# EAGLE board tinyI2C_P (EAGLE 6.5.0), part 1 of 2
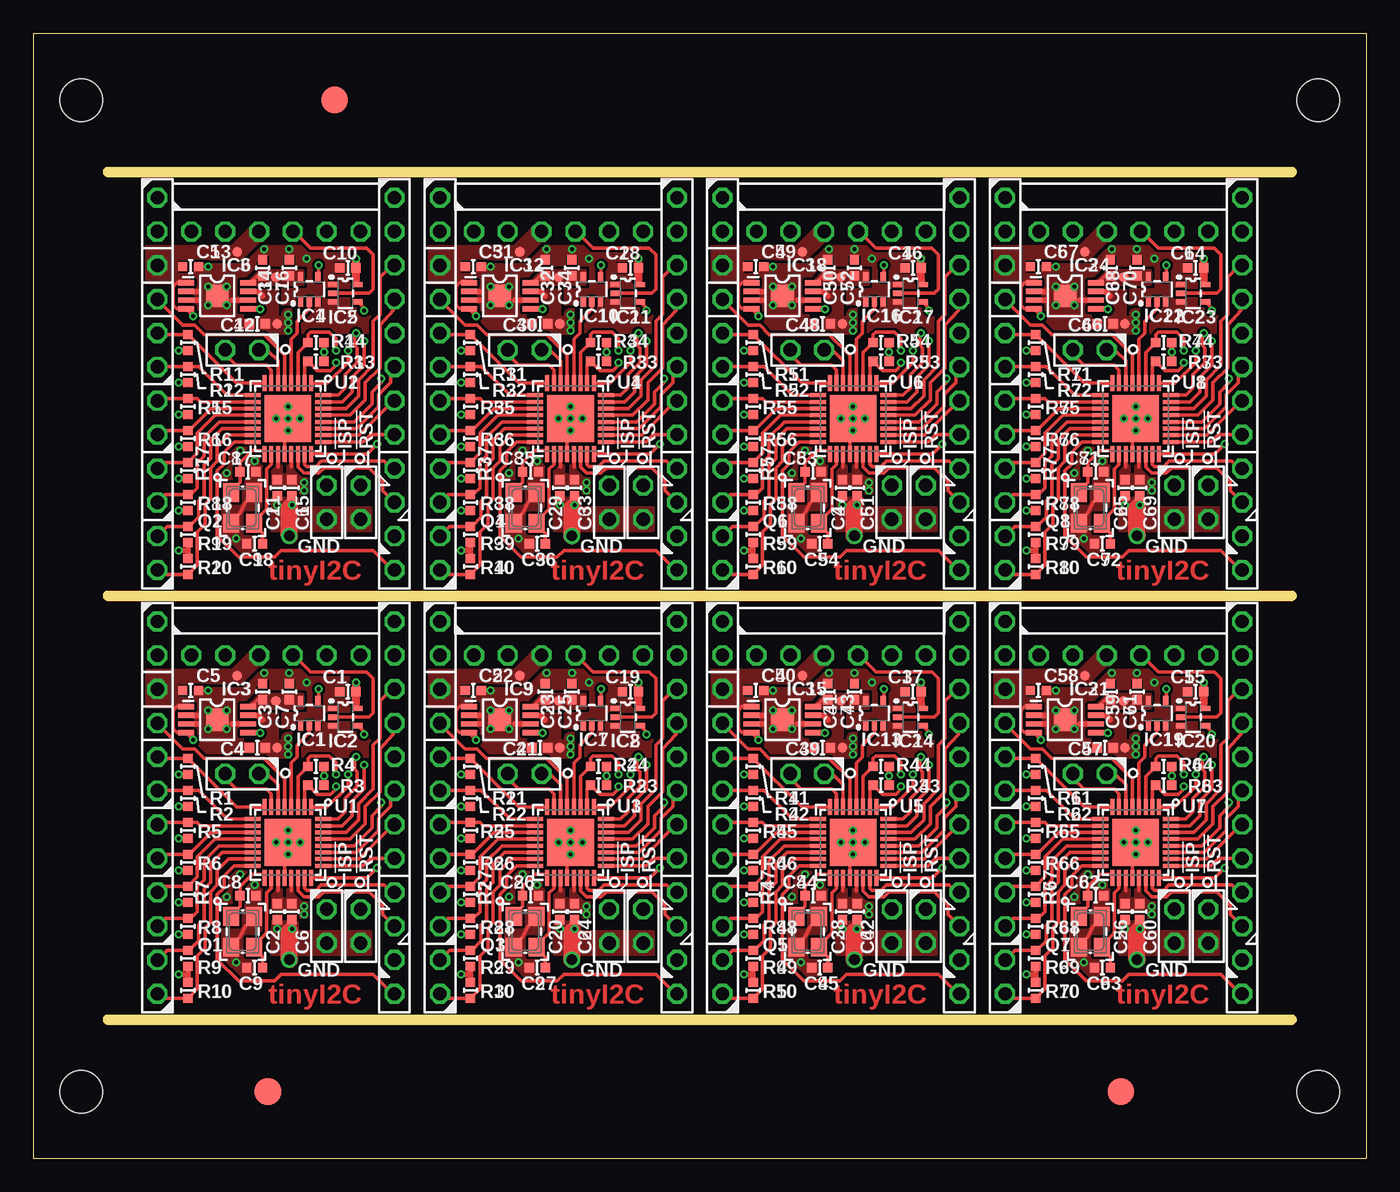
[diagram p0: board, top side]
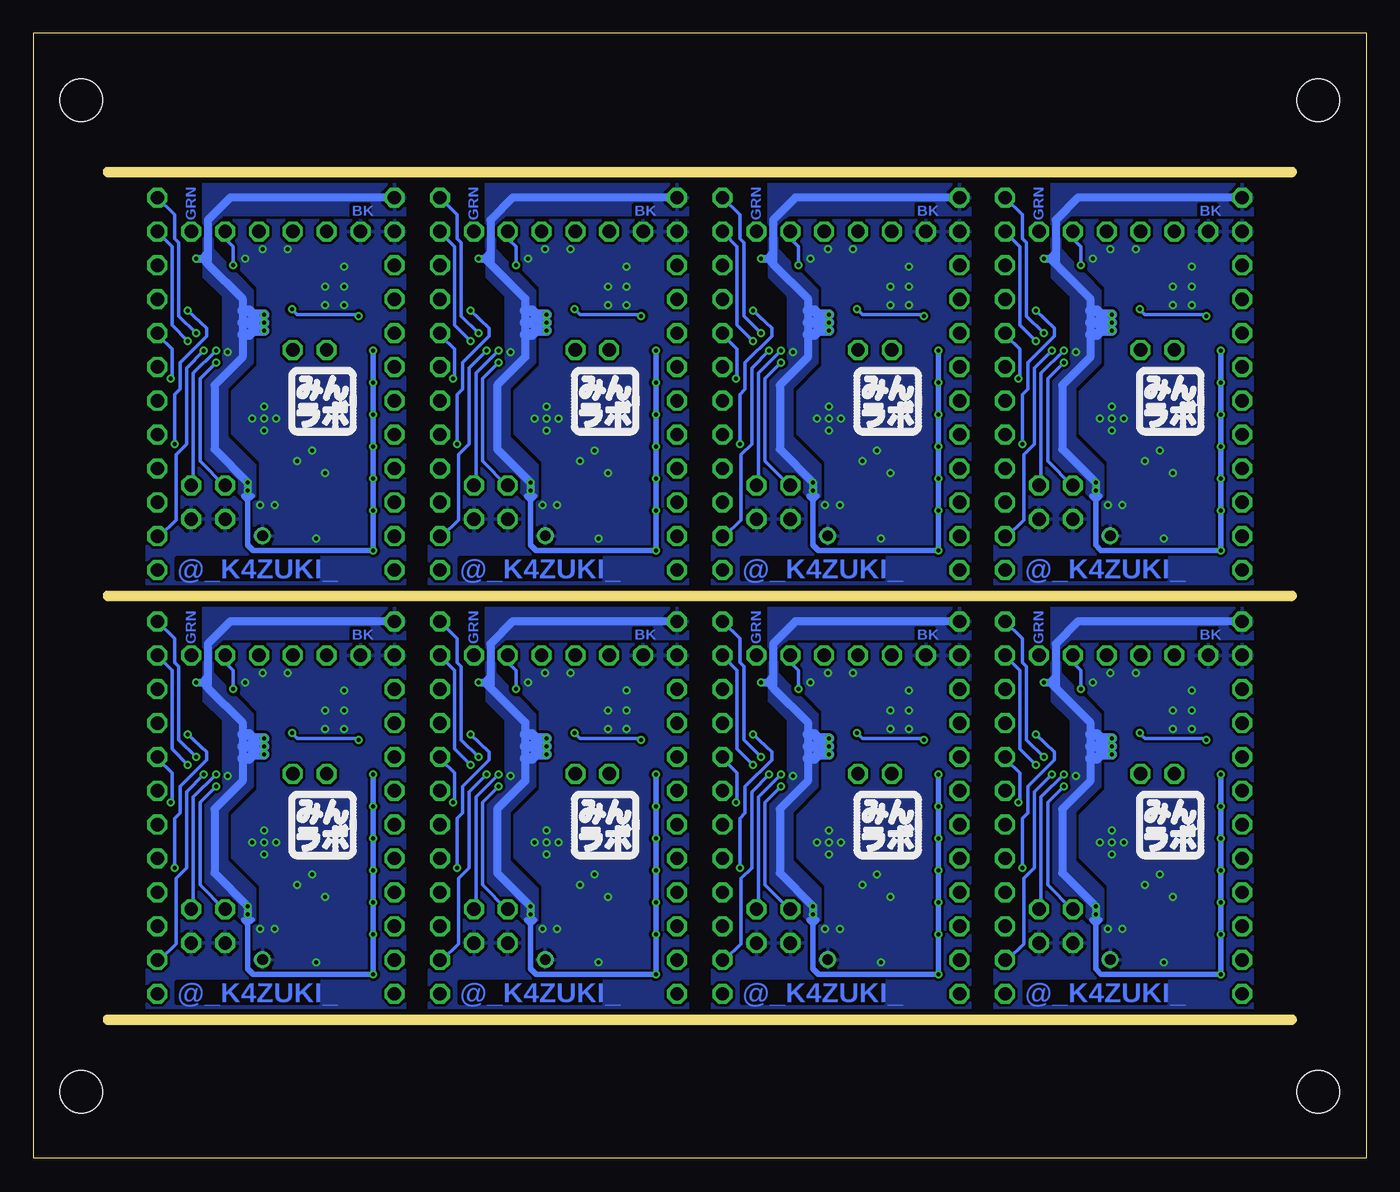
[diagram p1: board, bottom side, seen from below]

Size 100 x 84.4 mm. Coordinates in mm from the lower left corner, seen from the top.
Outline: 0,84.4 100,84.4 100,0 0,0 0,84.4
Copper layers (1*16): Top 0.035mm / dielectric 1.5mm / Bottom 0.035mm
Design rules "default *": minimum track width 0.16mm, minimum drill 0.3mm, track to track 0.16mm, track to pad 0.16mm, pad to pad 0.16mm, via to via 0.16mm, smd to smd 0mil, copper to edge 0.4mm, drill to drill 0.16mm, minimum pad ring 0.15mm, minimum via ring 0.15mm, stop-mask expansion 4mil, vias tented up to drill 100mil, thermal gap 10mil
Net classes: 0 default: clearance 0.2 mm; 1 power: clearance 0.2 mm
Holes 3.2 mm at 3.6,79.4 96.4,5 96.4,79.4 3.6,5
tRestrict: 296 lines
bRestrict: 48 lines
Milling: area 5.5,73.8 to 94.5,74.2; area 5.5,42 to 94.5,42.4; area 5.5,10.2 to 94.5,10.6

## Footprints (pad centres in the part's own frame; a part is rotated, then mirrored left to right if it is on the bottom)
C0402 = smd 0.7 x 0.7: 1 -0.6,0; 2 0.6,0
SC70-5 = smd 0.4 x 0.7: 1 -0.65,-0.95; 2 0,-0.95; 3 0.65,-0.95; 4 0.65,0.95; 5 -0.65,0.95
IC_08_0.65_160MIL_EP = smd 0.4 x 1.2: 1 -0.976,-2.313; 2 -0.326,-2.313; 3 0.324,-2.313; 4 0.974,-2.313; 5 0.974,2.312; 6 0.324,2.312; 7 -0.326,2.312; 8 -0.976,2.312 | smd 1.7 x 1.7: EXP 0,0
NX3225 = smd 1.4 x 1.2: 1 -1.15,-0.85; 2 1.15,-0.85; 3 1.15,0.85; 4 -1.15,0.85
TP07R = smd 0.7 x 0.7: TP 0,0
B1,27 = smd 1.27 x 1.27: TP 0,0
TP20R = smd 2 x 2: TP 0,0
HVQFN33 = smd 1.2 x 0.3: 1 -2.65,1.75; 2 -2.65,1.25; 3 -2.65,0.75; 4 -2.65,0.25; 5 -2.65,-0.25; 6 -2.65,-0.75; 7 -2.65,-1.25; 8 -2.65,-1.75; 17 2.65,-1.75; 18 2.65,-1.25; 19 2.65,-0.75; 20 2.65,-0.25; 21 2.65,0.25; 22 2.65,0.75; 23 2.65,1.25; 24 2.65,1.75 | smd 0.3 x 1.2: 9 -1.75,-2.65; 10 -1.25,-2.65; 11 -0.75,-2.65; 12 -0.25,-2.65; 13 0.25,-2.65; 14 0.75,-2.65; 15 1.25,-2.65; 16 1.75,-2.65; 25 1.75,2.65; 26 1.25,2.65; 27 0.75,2.65; 28 0.25,2.65; 29 -0.25,2.65; 30 -0.75,2.65; 31 -1.25,2.65; 32 -1.75,2.65 | smd 3.5 x 3.5: EXP 0,0
TSW-112-02-S-S = drill 1 pad 1.5 octagon: 1 13.97,0; 2 11.43,0; 3 8.89,0; 4 6.35,0; 5 3.81,0; 6 1.27,0; 7 -1.27,0; 8 -3.81,0; 9 -6.35,0; 10 -8.89,0; 11 -11.43,0; 12 -13.97,0
TSW-106-02-S-S-RA = drill 1 pad 1.5 octagon: 1 6.35,1.524; 2 3.81,1.524; 3 1.27,1.524; 4 -1.27,1.524; 5 -3.81,1.524; 6 -6.35,1.524
TSW-102-02-S-S = drill 1 pad 1.5 octagon: 1 1.27,0; 2 -1.27,0

## Placement (x,y rotation side)
C1  0.1u/1005  [C0402]  23.6,35 180 top
C2  0.1u/1005  [C0402]  18.3,18.5 270 top
C3  10u/1005  [C0402]  17.2,35 90 top
C4  10u/1005  [C0402]  16.8,30.8 180 top
C5  10u/1005  [C0402]  11.8,35.1 0 top
C6  0.1u/1005  [C0402]  19.4,18.5 270 top
C7  0.1u/1005  [C0402]  19.2,35 90 top
C8  18p/1005  [C0402]  16.1,19.7 0 top
C9  18p/1005  [C0402]  16.6,14.3 180 top
C10  0.1u/1005  [C0402]  23.6,66.8 180 top
C11  0.1u/1005  [C0402]  18.3,50.3 270 top
C12  10u/1005  [C0402]  16.8,62.6 180 top
C13  10u/1005  [C0402]  11.8,66.9 0 top
C14  10u/1005  [C0402]  17.2,66.8 90 top
C15  0.1u/1005  [C0402]  19.4,50.3 270 top
C16  0.1u/1005  [C0402]  19.2,66.8 90 top
C17  18p/1005  [C0402]  16.1,51.5 0 top
C18  18p/1005  [C0402]  16.6,46.1 180 top
C19  0.1u/1005  [C0402]  44.8,35 180 top
C20  0.1u/1005  [C0402]  39.5,18.5 270 top
C21  10u/1005  [C0402]  38,30.8 180 top
C22  10u/1005  [C0402]  33,35.1 0 top
C23  10u/1005  [C0402]  38.4,35 90 top
C24  0.1u/1005  [C0402]  40.6,18.5 270 top
C25  0.1u/1005  [C0402]  40.4,35 90 top
C26  18p/1005  [C0402]  37.3,19.7 0 top
C27  18p/1005  [C0402]  37.8,14.3 180 top
C28  0.1u/1005  [C0402]  44.8,66.8 180 top
C29  0.1u/1005  [C0402]  39.5,50.3 270 top
C30  10u/1005  [C0402]  38,62.6 180 top
C31  10u/1005  [C0402]  33,66.9 0 top
C32  10u/1005  [C0402]  38.4,66.8 90 top
C33  0.1u/1005  [C0402]  40.6,50.3 270 top
C34  0.1u/1005  [C0402]  40.4,66.8 90 top
C35  18p/1005  [C0402]  37.3,51.5 0 top
C36  18p/1005  [C0402]  37.8,46.1 180 top
C37  0.1u/1005  [C0402]  66,35 180 top
C38  0.1u/1005  [C0402]  60.7,18.5 270 top
C39  10u/1005  [C0402]  59.2,30.8 180 top
C40  10u/1005  [C0402]  54.2,35.1 0 top
C41  10u/1005  [C0402]  59.6,35 90 top
C42  0.1u/1005  [C0402]  61.8,18.5 270 top
C43  0.1u/1005  [C0402]  61.6,35 90 top
C44  18p/1005  [C0402]  58.5,19.7 0 top
C45  18p/1005  [C0402]  59,14.3 180 top
C46  0.1u/1005  [C0402]  66,66.8 180 top
C47  0.1u/1005  [C0402]  60.7,50.3 270 top
C48  10u/1005  [C0402]  59.2,62.6 180 top
C49  10u/1005  [C0402]  54.2,66.9 0 top
C50  10u/1005  [C0402]  59.6,66.8 90 top
C51  0.1u/1005  [C0402]  61.8,50.3 270 top
C52  0.1u/1005  [C0402]  61.6,66.8 90 top
C53  18p/1005  [C0402]  58.5,51.5 0 top
C54  18p/1005  [C0402]  59,46.1 180 top
C55  0.1u/1005  [C0402]  87.2,35 180 top
C56  0.1u/1005  [C0402]  81.9,18.5 270 top
C57  10u/1005  [C0402]  80.4,30.8 180 top
C58  10u/1005  [C0402]  75.4,35.1 0 top
C59  10u/1005  [C0402]  80.8,35 90 top
C60  0.1u/1005  [C0402]  83,18.5 270 top
C61  0.1u/1005  [C0402]  82.8,35 90 top
C62  18p/1005  [C0402]  79.7,19.7 0 top
C63  18p/1005  [C0402]  80.2,14.3 180 top
C64  0.1u/1005  [C0402]  87.2,66.8 180 top
C65  0.1u/1005  [C0402]  81.9,50.3 270 top
C66  10u/1005  [C0402]  80.4,62.6 180 top
C67  10u/1005  [C0402]  75.4,66.9 0 top
C68  10u/1005  [C0402]  80.8,66.8 90 top
C69  0.1u/1005  [C0402]  83,50.3 270 top
C70  0.1u/1005  [C0402]  82.8,66.8 90 top
C71  18p/1005  [C0402]  79.7,51.5 0 top
C72  18p/1005  [C0402]  80.2,46.1 180 top
I1  ICON_MINLAB_5.2S  [ICON_MINLAB_5.2MM]  17.2,22.5 0 bottom
I2  ICON_MINLAB_5.2S  [ICON_MINLAB_5.2MM]  17.2,54.3 0 bottom
I3  ICON_MINLAB_5.2S  [ICON_MINLAB_5.2MM]  38.4,22.5 0 bottom
I4  ICON_MINLAB_5.2S  [ICON_MINLAB_5.2MM]  38.4,54.3 0 bottom
I5  ICON_MINLAB_5.2S  [ICON_MINLAB_5.2MM]  59.6,22.5 0 bottom
I6  ICON_MINLAB_5.2S  [ICON_MINLAB_5.2MM]  59.6,54.3 0 bottom
I7  ICON_MINLAB_5.2S  [ICON_MINLAB_5.2MM]  80.8,22.5 0 bottom
I8  ICON_MINLAB_5.2S  [ICON_MINLAB_5.2MM]  80.8,54.3 0 bottom
IC1  74LVC1G125DCK  [SC70-5]  20.7,33.4 0 top
IC2  74LVC1G125DCK  [SC70-5]  23.4,33.1 270 top
IC3  IC_LDO_MIC5355  [IC_08_0.65_160MIL_EP]  13.8,32.9 270 top
IC4  74LVC1G125DCK  [SC70-5]  20.7,65.2 0 top
IC5  74LVC1G125DCK  [SC70-5]  23.4,64.9 270 top
IC6  IC_LDO_MIC5355  [IC_08_0.65_160MIL_EP]  13.8,64.7 270 top
IC7  74LVC1G125DCK  [SC70-5]  41.9,33.4 0 top
IC8  74LVC1G125DCK  [SC70-5]  44.6,33.1 270 top
IC9  IC_LDO_MIC5355  [IC_08_0.65_160MIL_EP]  35,32.9 270 top
IC10  74LVC1G125DCK  [SC70-5]  41.9,65.2 0 top
IC11  74LVC1G125DCK  [SC70-5]  44.6,64.9 270 top
IC12  IC_LDO_MIC5355  [IC_08_0.65_160MIL_EP]  35,64.7 270 top
IC13  74LVC1G125DCK  [SC70-5]  63.1,33.4 0 top
IC14  74LVC1G125DCK  [SC70-5]  65.8,33.1 270 top
IC15  IC_LDO_MIC5355  [IC_08_0.65_160MIL_EP]  56.2,32.9 270 top
IC16  74LVC1G125DCK  [SC70-5]  63.1,65.2 0 top
IC17  74LVC1G125DCK  [SC70-5]  65.8,64.9 270 top
IC18  IC_LDO_MIC5355  [IC_08_0.65_160MIL_EP]  56.2,64.7 270 top
IC19  74LVC1G125DCK  [SC70-5]  84.3,33.4 0 top
IC20  74LVC1G125DCK  [SC70-5]  87,33.1 270 top
IC21  IC_LDO_MIC5355  [IC_08_0.65_160MIL_EP]  77.4,32.9 270 top
IC22  74LVC1G125DCK  [SC70-5]  84.3,65.2 0 top
IC23  74LVC1G125DCK  [SC70-5]  87,64.9 270 top
IC24  IC_LDO_MIC5355  [IC_08_0.65_160MIL_EP]  77.4,64.7 270 top
Q1  12MHz  [NX3225]  15.7,17 270 top
Q2  12MHz  [NX3225]  15.7,48.8 270 top
Q3  12MHz  [NX3225]  36.9,17 270 top
Q4  12MHz  [NX3225]  36.9,48.8 270 top
Q5  12MHz  [NX3225]  58.1,17 270 top
Q6  12MHz  [NX3225]  58.1,48.8 270 top
Q7  12MHz  [NX3225]  79.3,17 270 top
Q8  12MHz  [NX3225]  79.3,48.8 270 top
R1  220/1005  [C0402]  11.6,29.4 270 top
R2  220/1005  [C0402]  11.6,27 270 top
R3  10k/1005  [C0402]  21.2,28 0 top
R4  10k/1005  [C0402]  21.2,29.4 0 top
R5  10k/1005  [C0402]  11.6,24.6 270 top
R6  10k/1005  [C0402]  11.6,22.2 270 top
R7  10k/1005  [C0402]  11.6,19.8 270 top
R8  10k/1005  [C0402]  11.6,17.4 270 top
R9  10k/1005  [C0402]  11.6,15 270 top
R10  10k/1005  [C0402]  11.6,12.6 90 top
R11  220/1005  [C0402]  11.6,61.2 270 top
R12  220/1005  [C0402]  11.6,58.8 270 top
R13  10k/1005  [C0402]  21.2,59.8 0 top
R14  10k/1005  [C0402]  21.2,61.2 0 top
R15  10k/1005  [C0402]  11.6,56.4 270 top
R16  10k/1005  [C0402]  11.6,54 270 top
R17  10k/1005  [C0402]  11.6,51.6 270 top
R18  10k/1005  [C0402]  11.6,49.2 270 top
R19  10k/1005  [C0402]  11.6,46.8 270 top
R20  10k/1005  [C0402]  11.6,44.4 90 top
R21  220/1005  [C0402]  32.8,29.4 270 top
R22  220/1005  [C0402]  32.8,27 270 top
R23  10k/1005  [C0402]  42.4,28 0 top
R24  10k/1005  [C0402]  42.4,29.4 0 top
R25  10k/1005  [C0402]  32.8,24.6 270 top
R26  10k/1005  [C0402]  32.8,22.2 270 top
R27  10k/1005  [C0402]  32.8,19.8 270 top
R28  10k/1005  [C0402]  32.8,17.4 270 top
R29  10k/1005  [C0402]  32.8,15 270 top
R30  10k/1005  [C0402]  32.8,12.6 90 top
R31  220/1005  [C0402]  32.8,61.2 270 top
R32  220/1005  [C0402]  32.8,58.8 270 top
R33  10k/1005  [C0402]  42.4,59.8 0 top
R34  10k/1005  [C0402]  42.4,61.2 0 top
R35  10k/1005  [C0402]  32.8,56.4 270 top
R36  10k/1005  [C0402]  32.8,54 270 top
R37  10k/1005  [C0402]  32.8,51.6 270 top
R38  10k/1005  [C0402]  32.8,49.2 270 top
R39  10k/1005  [C0402]  32.8,46.8 270 top
R40  10k/1005  [C0402]  32.8,44.4 90 top
R41  220/1005  [C0402]  54,29.4 270 top
R42  220/1005  [C0402]  54,27 270 top
R43  10k/1005  [C0402]  63.6,28 0 top
R44  10k/1005  [C0402]  63.6,29.4 0 top
R45  10k/1005  [C0402]  54,24.6 270 top
R46  10k/1005  [C0402]  54,22.2 270 top
R47  10k/1005  [C0402]  54,19.8 270 top
R48  10k/1005  [C0402]  54,17.4 270 top
R49  10k/1005  [C0402]  54,15 270 top
R50  10k/1005  [C0402]  54,12.6 90 top
R51  220/1005  [C0402]  54,61.2 270 top
R52  220/1005  [C0402]  54,58.8 270 top
R53  10k/1005  [C0402]  63.6,59.8 0 top
R54  10k/1005  [C0402]  63.6,61.2 0 top
R55  10k/1005  [C0402]  54,56.4 270 top
R56  10k/1005  [C0402]  54,54 270 top
R57  10k/1005  [C0402]  54,51.6 270 top
R58  10k/1005  [C0402]  54,49.2 270 top
R59  10k/1005  [C0402]  54,46.8 270 top
R60  10k/1005  [C0402]  54,44.4 90 top
R61  220/1005  [C0402]  75.2,29.4 270 top
R62  220/1005  [C0402]  75.2,27 270 top
R63  10k/1005  [C0402]  84.8,28 0 top
R64  10k/1005  [C0402]  84.8,29.4 0 top
R65  10k/1005  [C0402]  75.2,24.6 270 top
R66  10k/1005  [C0402]  75.2,22.2 270 top
R67  10k/1005  [C0402]  75.2,19.8 270 top
R68  10k/1005  [C0402]  75.2,17.4 270 top
R69  10k/1005  [C0402]  75.2,15 270 top
R70  10k/1005  [C0402]  75.2,12.6 90 top
R71  220/1005  [C0402]  75.2,61.2 270 top
R72  220/1005  [C0402]  75.2,58.8 270 top
R73  10k/1005  [C0402]  84.8,59.8 0 top
R74  10k/1005  [C0402]  84.8,61.2 0 top
R75  10k/1005  [C0402]  75.2,56.4 270 top
R76  10k/1005  [C0402]  75.2,54 270 top
R77  10k/1005  [C0402]  75.2,51.6 270 top
R78  10k/1005  [C0402]  75.2,49.2 270 top
R79  10k/1005  [C0402]  75.2,46.8 270 top
R80  10k/1005  [C0402]  75.2,44.4 90 top
TP1  TPTP07R  [TP07R]  15.3,36.2 0 top
TP2  TPTP07R  [TP07R]  18.3,30.8 0 top
TP3  TPB1,27  [B1,27]  19.2,14.9 0 top
TP4  TPTP20R  [TP20R]  22.6,79.4 0 top
TP5  TPTP20R  [TP20R]  81.6,5 0 top
TP6  TPTP07R  [TP07R]  18.2,34.3 0 top
TP7  TPB1,27  [B1,27]  19.2,14.9 0 bottom
TP8  TPTP20R  [TP20R]  17.6,5 0 top
TP9  TPTP07R  [TP07R]  15.3,68 0 top
TP10  TPTP07R  [TP07R]  18.3,62.6 0 top
TP11  TPB1,27  [B1,27]  19.2,46.7 0 top
TP12  TPTP07R  [TP07R]  18.2,66.1 0 top
TP13  TPB1,27  [B1,27]  19.2,46.7 0 bottom
TP14  TPTP07R  [TP07R]  36.5,36.2 0 top
TP15  TPTP07R  [TP07R]  39.5,30.8 0 top
TP16  TPB1,27  [B1,27]  40.4,14.9 0 top
TP17  TPTP07R  [TP07R]  39.4,34.3 0 top
TP18  TPB1,27  [B1,27]  40.4,14.9 0 bottom
TP19  TPTP07R  [TP07R]  36.5,68 0 top
TP20  TPTP07R  [TP07R]  39.5,62.6 0 top
TP21  TPB1,27  [B1,27]  40.4,46.7 0 top
TP22  TPTP07R  [TP07R]  39.4,66.1 0 top
TP23  TPB1,27  [B1,27]  40.4,46.7 0 bottom
TP24  TPTP07R  [TP07R]  57.7,36.2 0 top
TP25  TPTP07R  [TP07R]  60.7,30.8 0 top
TP26  TPB1,27  [B1,27]  61.6,14.9 0 top
TP27  TPTP07R  [TP07R]  60.6,34.3 0 top
TP28  TPB1,27  [B1,27]  61.6,14.9 0 bottom
TP29  TPTP07R  [TP07R]  57.7,68 0 top
TP30  TPTP07R  [TP07R]  60.7,62.6 0 top
TP31  TPB1,27  [B1,27]  61.6,46.7 0 top
TP32  TPTP07R  [TP07R]  60.6,66.1 0 top
TP33  TPB1,27  [B1,27]  61.6,46.7 0 bottom
TP34  TPTP07R  [TP07R]  78.9,36.2 0 top
TP35  TPTP07R  [TP07R]  81.9,30.8 0 top
TP36  TPB1,27  [B1,27]  82.8,14.9 0 top
TP37  TPTP07R  [TP07R]  81.8,34.3 0 top
TP38  TPB1,27  [B1,27]  82.8,14.9 0 bottom
TP39  TPTP07R  [TP07R]  78.9,68 0 top
TP40  TPTP07R  [TP07R]  81.9,62.6 0 top
TP41  TPB1,27  [B1,27]  82.8,46.7 0 top
TP42  TPTP07R  [TP07R]  81.8,66.1 0 top
TP43  TPB1,27  [B1,27]  82.8,46.7 0 bottom
U1  LPC824M201JHI33  [HVQFN33]  19.1,23.7 270 top
U2  LPC824M201JHI33  [HVQFN33]  19.1,55.5 270 top
U3  LPC824M201JHI33  [HVQFN33]  40.3,23.7 270 top
U4  LPC824M201JHI33  [HVQFN33]  40.3,55.5 270 top
U5  LPC824M201JHI33  [HVQFN33]  61.5,23.7 270 top
U6  LPC824M201JHI33  [HVQFN33]  61.5,55.5 270 top
U7  LPC824M201JHI33  [HVQFN33]  82.7,23.7 270 top
U8  LPC824M201JHI33  [HVQFN33]  82.7,55.5 270 top
X1  TSW-112-02-S-S  [TSW-112-02-S-S]  9.31,26.3 90 top
X2  TSW-112-02-S-S  [TSW-112-02-S-S]  27.09,26.3 90 top
X3  TSW-106-02-S-S-RA  [TSW-106-02-S-S-RA]  18.2,39.25 180 top
X4  TSW-102-02-S-S  [TSW-102-02-S-S]  24.55,17.41 90 top
X5  TSW-102-02-S-S  [TSW-102-02-S-S]  15.66,28.84 0 top
X6  TSW-102-02-S-S  [TSW-102-02-S-S]  22.01,17.41 90 top
X7  TSW-106-02-S-S-RA  [TSW-106-02-S-S-RA]  18.2,71.05 180 top
X8  TSW-112-02-S-S  [TSW-112-02-S-S]  9.31,58.1 90 top
X9  TSW-112-02-S-S  [TSW-112-02-S-S]  27.09,58.1 90 top
X10  TSW-102-02-S-S  [TSW-102-02-S-S]  24.55,49.21 90 top
X11  TSW-102-02-S-S  [TSW-102-02-S-S]  15.66,60.64 0 top
X12  TSW-102-02-S-S  [TSW-102-02-S-S]  22.01,49.21 90 top
X13  TSW-106-02-S-S-RA  [TSW-106-02-S-S-RA]  39.4,39.25 180 top
X14  TSW-112-02-S-S  [TSW-112-02-S-S]  30.51,26.3 90 top
X15  TSW-112-02-S-S  [TSW-112-02-S-S]  48.29,26.3 90 top
X16  TSW-102-02-S-S  [TSW-102-02-S-S]  45.75,17.41 90 top
X17  TSW-102-02-S-S  [TSW-102-02-S-S]  36.86,28.84 0 top
X18  TSW-102-02-S-S  [TSW-102-02-S-S]  43.21,17.41 90 top
X19  TSW-106-02-S-S-RA  [TSW-106-02-S-S-RA]  39.4,71.05 180 top
X20  TSW-112-02-S-S  [TSW-112-02-S-S]  30.51,58.1 90 top
X21  TSW-112-02-S-S  [TSW-112-02-S-S]  48.29,58.1 90 top
X22  TSW-102-02-S-S  [TSW-102-02-S-S]  45.75,49.21 90 top
X23  TSW-102-02-S-S  [TSW-102-02-S-S]  36.86,60.64 0 top
X24  TSW-102-02-S-S  [TSW-102-02-S-S]  43.21,49.21 90 top
X25  TSW-106-02-S-S-RA  [TSW-106-02-S-S-RA]  60.6,39.25 180 top
X26  TSW-112-02-S-S  [TSW-112-02-S-S]  51.71,26.3 90 top
X27  TSW-112-02-S-S  [TSW-112-02-S-S]  69.49,26.3 90 top
X28  TSW-102-02-S-S  [TSW-102-02-S-S]  66.95,17.41 90 top
X29  TSW-102-02-S-S  [TSW-102-02-S-S]  58.06,28.84 0 top
X30  TSW-102-02-S-S  [TSW-102-02-S-S]  64.41,17.41 90 top
X31  TSW-106-02-S-S-RA  [TSW-106-02-S-S-RA]  60.6,71.05 180 top
X32  TSW-112-02-S-S  [TSW-112-02-S-S]  51.71,58.1 90 top
X33  TSW-112-02-S-S  [TSW-112-02-S-S]  69.49,58.1 90 top
X34  TSW-102-02-S-S  [TSW-102-02-S-S]  66.95,49.21 90 top
X35  TSW-102-02-S-S  [TSW-102-02-S-S]  58.06,60.64 0 top
X36  TSW-102-02-S-S  [TSW-102-02-S-S]  64.41,49.21 90 top
X37  TSW-106-02-S-S-RA  [TSW-106-02-S-S-RA]  81.8,39.25 180 top
X38  TSW-112-02-S-S  [TSW-112-02-S-S]  72.91,26.3 90 top
X39  TSW-112-02-S-S  [TSW-112-02-S-S]  90.69,26.3 90 top
X40  TSW-102-02-S-S  [TSW-102-02-S-S]  88.15,17.41 90 top
X41  TSW-102-02-S-S  [TSW-102-02-S-S]  79.26,28.84 0 top
X42  TSW-102-02-S-S  [TSW-102-02-S-S]  85.61,17.41 90 top
X43  TSW-106-02-S-S-RA  [TSW-106-02-S-S-RA]  81.8,71.05 180 top
X44  TSW-112-02-S-S  [TSW-112-02-S-S]  72.91,58.1 90 top
X45  TSW-112-02-S-S  [TSW-112-02-S-S]  90.69,58.1 90 top
X46  TSW-102-02-S-S  [TSW-102-02-S-S]  88.15,49.21 90 top
X47  TSW-102-02-S-S  [TSW-102-02-S-S]  79.26,60.64 0 top
X48  TSW-102-02-S-S  [TSW-102-02-S-S]  85.61,49.21 90 top

## Library data of the parts
C1-C72 I1-I8 IC3 IC6 IC9 IC12 IC15 IC18 IC21 IC24 R1-R80 U1-U8 = mylib
IC1 IC2 IC4 IC5 IC7 IC8 IC10 IC11 IC13 IC14 IC16 IC17 IC19 IC20 IC22 IC23 = 74xx-little-us_local
Q1-Q8 = adafruit (1)
TP1-TP43 = testpad_local
X1-X48 = con-samtec.local; OC_FARNELL: unknown; OC_NEWARK: unknown

## Nets
1.8V: C1.1 C2.1 C4.1 C6.1 IC2.5 IC3.7 R1.2 R2.2 R3.2 R4.2 R5.2 R6.2 R7.2 R8.2 R9.2 R10.2 TP2.TP U1.19 U1.21 X1.1
1.8V1: C10.1 C11.1 C12.1 C15.1 IC5.5 IC6.7 R11.2 R12.2 R13.2 R14.2 R15.2 R16.2 R17.2 R18.2 R19.2 R20.2 TP10.TP U2.19 U2.21 X8.1
1.8V2: C19.1 C20.1 C21.1 C24.1 IC8.5 IC9.7 R21.2 R22.2 R23.2 R24.2 R25.2 R26.2 R27.2 R28.2 R29.2 R30.2 TP15.TP U3.19 U3.21 X14.1
1.8V3: C28.1 C29.1 C30.1 C33.1 IC11.5 IC12.7 R31.2 R32.2 R33.2 R34.2 R35.2 R36.2 R37.2 R38.2 R39.2 R40.2 TP20.TP U4.19 U4.21 X20.1
1.8V4: C37.1 C38.1 C39.1 C42.1 IC14.5 IC15.7 R41.2 R42.2 R43.2 R44.2 R45.2 R46.2 R47.2 R48.2 R49.2 R50.2 TP25.TP U5.19 U5.21 X26.1
1.8V5: C46.1 C47.1 C48.1 C51.1 IC17.5 IC18.7 R51.2 R52.2 R53.2 R54.2 R55.2 R56.2 R57.2 R58.2 R59.2 R60.2 TP30.TP U6.19 U6.21 X32.1
1.8V6: C55.1 C56.1 C57.1 C60.1 IC20.5 IC21.7 R61.2 R62.2 R63.2 R64.2 R65.2 R66.2 R67.2 R68.2 R69.2 R70.2 TP35.TP U7.19 U7.21 X38.1
1.8V7: C64.1 C65.1 C66.1 C69.1 IC23.5 IC24.7 R71.2 R72.2 R73.2 R74.2 R75.2 R76.2 R77.2 R78.2 R79.2 R80.2 TP40.TP U8.19 U8.21 X44.1
3.3V: C3.1 C7.1 IC1.5 IC3.8 TP6.TP
3.3V1: C14.1 C16.1 IC4.5 IC6.8 TP12.TP
3.3V2: C23.1 C25.1 IC7.5 IC9.8 TP17.TP
3.3V3: C32.1 C34.1 IC10.5 IC12.8 TP22.TP
3.3V4: C41.1 C43.1 IC13.5 IC15.8 TP27.TP
3.3V5: C50.1 C52.1 IC16.5 IC18.8 TP32.TP
3.3V6: C59.1 C61.1 IC19.5 IC21.8 TP37.TP
3.3V7: C68.1 C70.1 IC22.5 IC24.8 TP42.TP
5V: C5.1 IC3.1 IC3.4 IC3.5 TP1.TP X1.3 X3.3
5V1: C13.1 IC6.1 IC6.4 IC6.5 TP9.TP X7.3 X8.3
5V2: C22.1 IC9.1 IC9.4 IC9.5 TP14.TP X13.3 X14.3
5V3: C31.1 IC12.1 IC12.4 IC12.5 TP19.TP X19.3 X20.3
5V4: C40.1 IC15.1 IC15.4 IC15.5 TP24.TP X25.3 X26.3
5V5: C49.1 IC18.1 IC18.4 IC18.5 TP29.TP X31.3 X32.3
5V6: C58.1 IC21.1 IC21.4 IC21.5 TP34.TP X37.3 X38.3
5V7: C67.1 IC24.1 IC24.4 IC24.5 TP39.TP X43.3 X44.3
!ISP!: R3.1 U1.2 X6.1
!ISP!1: R13.1 U2.2 X12.1
!ISP!2: R23.1 U3.2 X18.1
!ISP!3: R33.1 U4.2 X24.1
!ISP!4: R43.1 U5.2 X30.1
!ISP!5: R53.1 U6.2 X36.1
!ISP!6: R63.1 U7.2 X42.1
!ISP!7: R73.1 U8.2 X48.1
!RESET!: R4.1 U1.3 X4.1
!RESET!1: R14.1 U2.3 X10.1
!RESET!2: R24.1 U3.3 X16.1
!RESET!3: R34.1 U4.3 X22.1
!RESET!4: R44.1 U5.3 X28.1
!RESET!5: R54.1 U6.3 X34.1
!RESET!6: R64.1 U7.3 X40.1
!RESET!7: R74.1 U8.3 X46.1
GND: C1.2 C2.2 C3.2 C4.2 C5.2 C6.2 C7.2 C8.2 C9.2 IC1.1 IC1.3 IC2.1 IC2.3 IC3.2 IC3.3 IC3.6 IC3.EXP Q1.2 Q1.4 TP3.TP TP7.TP U1.20 U1.EXP X1.2 X3.1 X4.2 X6.2
GND1: C10.2 C11.2 C12.2 C13.2 C14.2 C15.2 C16.2 C17.2 C18.2 IC4.1 IC4.3 IC5.1 IC5.3 IC6.2 IC6.3 IC6.6 IC6.EXP Q2.2 Q2.4 TP11.TP TP13.TP U2.20 U2.EXP X7.1 X8.2 X10.2 X12.2
GND2: C19.2 C20.2 C21.2 C22.2 C23.2 C24.2 C25.2 C26.2 C27.2 IC7.1 IC7.3 IC8.1 IC8.3 IC9.2 IC9.3 IC9.6 IC9.EXP Q3.2 Q3.4 TP16.TP TP18.TP U3.20 U3.EXP X13.1 X14.2 X16.2 X18.2
GND3: C28.2 C29.2 C30.2 C31.2 C32.2 C33.2 C34.2 C35.2 C36.2 IC10.1 IC10.3 IC11.1 IC11.3 IC12.2 IC12.3 IC12.6 IC12.EXP Q4.2 Q4.4 TP21.TP TP23.TP U4.20 U4.EXP X19.1 X20.2 X22.2 X24.2
GND4: C37.2 C38.2 C39.2 C40.2 C41.2 C42.2 C43.2 C44.2 C45.2 IC13.1 IC13.3 IC14.1 IC14.3 IC15.2 IC15.3 IC15.6 IC15.EXP Q5.2 Q5.4 TP26.TP TP28.TP U5.20 U5.EXP X25.1 X26.2 X28.2 X30.2
GND5: C46.2 C47.2 C48.2 C49.2 C50.2 C51.2 C52.2 C53.2 C54.2 IC16.1 IC16.3 IC17.1 IC17.3 IC18.2 IC18.3 IC18.6 IC18.EXP Q6.2 Q6.4 TP31.TP TP33.TP U6.20 U6.EXP X31.1 X32.2 X34.2 X36.2
GND6: C55.2 C56.2 C57.2 C58.2 C59.2 C60.2 C61.2 C62.2 C63.2 IC19.1 IC19.3 IC20.1 IC20.3 IC21.2 IC21.3 IC21.6 IC21.EXP Q7.2 Q7.4 TP36.TP TP38.TP U7.20 U7.EXP X37.1 X38.2 X40.2 X42.2
GND7: C64.2 C65.2 C66.2 C67.2 C68.2 C69.2 C70.2 C71.2 C72.2 IC22.1 IC22.3 IC23.1 IC23.3 IC24.2 IC24.3 IC24.6 IC24.EXP Q8.2 Q8.4 TP41.TP TP43.TP U8.20 U8.EXP X43.1 X44.2 X46.2 X48.2
GPIO00: U1.32 X2.1
GPIO01: U1.31 X2.2
GPIO02: U1.30 X2.3
GPIO03: U1.29 X2.4
GPIO04: U1.28 X2.5
GPIO05: U1.27 X2.6
GPIO06: U1.26 X2.7
GPIO07: U1.25 X2.8
GPIO08: U2.5 X8.4
GPIO09: R15.1 U2.10 X8.7
GPIO10: R10.1 U1.15 X1.12
GPIO11: R9.1 U1.14 X1.11
GPIO12: R8.1 U1.13 X1.10
GPIO13: R7.1 U1.12 X1.9
GPIO14: R6.1 U1.11 X1.8
GPIO15: R5.1 U1.10 X1.7
GPIO16: U1.5 X1.4
GPIO17: R16.1 U2.11 X8.8
GPIO18: R17.1 U2.12 X8.9
GPIO19: R18.1 U2.13 X8.10
GPIO20: R19.1 U2.14 X8.11
GPIO21: R20.1 U2.15 X8.12
GPIO22: U2.25 X9.8
GPIO23: U2.26 X9.7
GPIO24: U2.27 X9.6
GPIO25: U2.28 X9.5
GPIO26: U2.29 X9.4
GPIO27: U2.30 X9.3
GPIO28: U2.31 X9.2
GPIO29: U2.32 X9.1
GPIO30: U3.5 X14.4
GPIO31: R25.1 U3.10 X14.7
GPIO32: R26.1 U3.11 X14.8
GPIO33: R27.1 U3.12 X14.9
GPIO34: R28.1 U3.13 X14.10
GPIO35: R29.1 U3.14 X14.11
GPIO36: R30.1 U3.15 X14.12
GPIO37: U3.25 X15.8
GPIO38: U3.26 X15.7
GPIO39: U3.27 X15.6
GPIO40: U3.28 X15.5
GPIO41: U3.29 X15.4
GPIO42: U3.30 X15.3
GPIO43: U3.31 X15.2
GPIO44: U3.32 X15.1
GPIO45: U4.5 X20.4
GPIO46: R35.1 U4.10 X20.7
GPIO47: R36.1 U4.11 X20.8
GPIO48: R37.1 U4.12 X20.9
GPIO49: R38.1 U4.13 X20.10
GPIO50: R39.1 U4.14 X20.11
GPIO51: R40.1 U4.15 X20.12
GPIO52: U4.25 X21.8
GPIO53: U4.26 X21.7
GPIO54: U4.27 X21.6
GPIO55: U4.28 X21.5
GPIO56: U4.29 X21.4
GPIO57: U4.30 X21.3
GPIO58: U4.31 X21.2
GPIO59: U4.32 X21.1
GPIO60: U5.5 X26.4
GPIO61: R45.1 U5.10 X26.7
GPIO62: R46.1 U5.11 X26.8
GPIO63: R47.1 U5.12 X26.9
GPIO64: R48.1 U5.13 X26.10
GPIO65: R49.1 U5.14 X26.11
GPIO66: R50.1 U5.15 X26.12
GPIO67: U5.25 X27.8
GPIO68: U5.26 X27.7
GPIO69: U5.27 X27.6
GPIO70: U5.28 X27.5
GPIO71: U5.29 X27.4
GPIO72: U5.30 X27.3
GPIO73: U5.31 X27.2
GPIO74: U5.32 X27.1
GPIO75: U6.5 X32.4
GPIO76: R55.1 U6.10 X32.7
GPIO77: R56.1 U6.11 X32.8
GPIO78: R57.1 U6.12 X32.9
GPIO79: R58.1 U6.13 X32.10
GPIO80: R59.1 U6.14 X32.11
GPIO81: R60.1 U6.15 X32.12
GPIO82: U6.25 X33.8
GPIO83: U6.26 X33.7
GPIO84: U6.27 X33.6
GPIO85: U6.28 X33.5
GPIO86: U6.29 X33.4
GPIO87: U6.30 X33.3
GPIO88: U6.31 X33.2
GPIO89: U6.32 X33.1
GPIO90: U7.5 X38.4
GPIO91: R65.1 U7.10 X38.7
GPIO92: R66.1 U7.11 X38.8
GPIO93: R67.1 U7.12 X38.9
GPIO94: R68.1 U7.13 X38.10
GPIO95: R69.1 U7.14 X38.11
GPIO96: R70.1 U7.15 X38.12
GPIO97: U7.25 X39.8
GPIO98: U7.26 X39.7
GPIO99: U7.27 X39.6
GPIO100: U7.28 X39.5
GPIO101: U7.29 X39.4
GPIO102: U7.30 X39.3
GPIO103: U7.31 X39.2
GPIO104: U7.32 X39.1
GPIO105: U8.5 X44.4
GPIO106: R75.1 U8.10 X44.7
GPIO107: R76.1 U8.11 X44.8
GPIO108: R77.1 U8.12 X44.9
GPIO109: R78.1 U8.13 X44.10
GPIO110: R79.1 U8.14 X44.11
GPIO111: R80.1 U8.15 X44.12
GPIO112: U8.25 X45.8
GPIO113: U8.26 X45.7
GPIO114: U8.27 X45.6
GPIO115: U8.28 X45.5
GPIO116: U8.29 X45.4
GPIO117: U8.30 X45.3
GPIO118: U8.31 X45.2
GPIO119: U8.32 X45.1
I2C_SCL: R2.1 U1.9 X1.6
I2C_SCL1: R12.1 U2.9 X8.6
I2C_SCL2: R22.1 U3.9 X14.6
I2C_SCL3: R32.1 U4.9 X20.6
I2C_SCL4: R42.1 U5.9 X26.6
I2C_SCL5: R52.1 U6.9 X32.6
I2C_SCL6: R62.1 U7.9 X38.6
I2C_SCL7: R72.1 U8.9 X44.6
I2C_SDA: R1.1 U1.8 X1.5
I2C_SDA1: R11.1 U2.8 X8.5
I2C_SDA2: R21.1 U3.8 X14.5
I2C_SDA3: R31.1 U4.8 X20.5
I2C_SDA4: R41.1 U5.8 X26.5
I2C_SDA5: R51.1 U6.8 X32.5
I2C_SDA6: R61.1 U7.8 X38.5
I2C_SDA7: R71.1 U8.8 X44.5
N$1: C8.1 Q1.1 U1.17
N$2: C17.1 Q2.1 U2.17
N$3: C9.1 Q1.3 U1.18
N$5: C18.1 Q2.3 U2.18
N$6: C26.1 Q3.1 U3.17
N$7: C27.1 Q3.3 U3.18
N$8: C35.1 Q4.1 U4.17
N$9: C36.1 Q4.3 U4.18
N$10: C44.1 Q5.1 U5.17
N$11: C45.1 Q5.3 U5.18
N$12: C53.1 Q6.1 U6.17
N$13: C54.1 Q6.3 U6.18
N$14: C62.1 Q7.1 U7.17
N$15: C63.1 Q7.3 U7.18
N$16: C71.1 Q8.1 U8.17
N$17: C72.1 Q8.3 U8.18
RX<-: IC1.4 X3.5
RX<-1: IC4.4 X7.5
RX<-2: IC7.4 X13.5
RX<-3: IC10.4 X19.5
RX<-4: IC13.4 X25.5
RX<-5: IC16.4 X31.5
RX<-6: IC19.4 X37.5
RX<-7: IC22.4 X43.5
SPI_CS: U1.16 X2.12
SPI_CS1: U2.16 X9.12
SPI_CS2: U3.16 X15.12
SPI_CS3: U4.16 X21.12
SPI_CS4: U5.16 X27.12
SPI_CS5: U6.16 X33.12
SPI_CS6: U7.16 X39.12
SPI_CS7: U8.16 X45.12
SPI_MISO: U1.22 X2.10
SPI_MISO1: U2.22 X9.10
SPI_MISO2: U3.22 X15.10
SPI_MISO3: U4.22 X21.10
SPI_MISO4: U5.22 X27.10
SPI_MISO5: U6.22 X33.10
SPI_MISO6: U7.22 X39.10
SPI_MISO7: U8.22 X45.10
SPI_MOSI: U1.23 X2.9
SPI_MOSI1: U2.23 X9.9
SPI_MOSI2: U3.23 X15.9
SPI_MOSI3: U4.23 X21.9
SPI_MOSI4: U5.23 X27.9
SPI_MOSI5: U6.23 X33.9
SPI_MOSI6: U7.23 X39.9
SPI_MOSI7: U8.23 X45.9
SPI_SCK: U1.1 X2.11
SPI_SCK1: U2.1 X9.11
SPI_SCK2: U3.1 X15.11
SPI_SCK3: U4.1 X21.11
SPI_SCK4: U5.1 X27.11
SPI_SCK5: U6.1 X33.11
SPI_SCK6: U7.1 X39.11
SPI_SCK7: U8.1 X45.11
SWCLK: U1.6 X5.1
SWCLK1: U2.6 X11.1
SWCLK2: U3.6 X17.1
SWCLK3: U4.6 X23.1
SWCLK4: U5.6 X29.1
SWCLK5: U6.6 X35.1
SWCLK6: U7.6 X41.1
SWCLK7: U8.6 X47.1
SWDIO: U1.7 X5.2
SWDIO1: U2.7 X11.2
SWDIO2: U3.7 X17.2
SWDIO3: U4.7 X23.2
SWDIO4: U5.7 X29.2
SWDIO5: U6.7 X35.2
SWDIO6: U7.7 X41.2
SWDIO7: U8.7 X47.2
TGT_RX: IC2.4 U1.24
TGT_RX1: IC5.4 U2.24
TGT_RX2: IC8.4 U3.24
TGT_RX3: IC11.4 U4.24
TGT_RX4: IC14.4 U5.24
TGT_RX5: IC17.4 U6.24
TGT_RX6: IC20.4 U7.24
TGT_RX7: IC23.4 U8.24
TGT_TX: IC1.2 U1.4
TGT_TX1: IC4.2 U2.4
TGT_TX2: IC7.2 U3.4
TGT_TX3: IC10.2 U4.4
TGT_TX4: IC13.2 U5.4
TGT_TX5: IC16.2 U6.4
TGT_TX6: IC19.2 U7.4
TGT_TX7: IC22.2 U8.4
TX->: IC2.2 X3.4
TX->1: IC5.2 X7.4
TX->2: IC8.2 X13.4
TX->3: IC11.2 X19.4
TX->4: IC14.2 X25.4
TX->5: IC17.2 X31.4
TX->6: IC20.2 X37.4
TX->7: IC23.2 X43.4